# Altium PCB ET4207_DEBUG.PcbDoc
Units mil, origin at the board's own origin, x right, y up, seen from the top; angles counter-clockwise.
Board outline 3108.03 x 2008.03 mil, 2 copper layers (Top Layer, Bottom Layer); 65 components, 38 nets, 176 pads, 41 vias.
Unrouted connection lines stored in the file: 4.
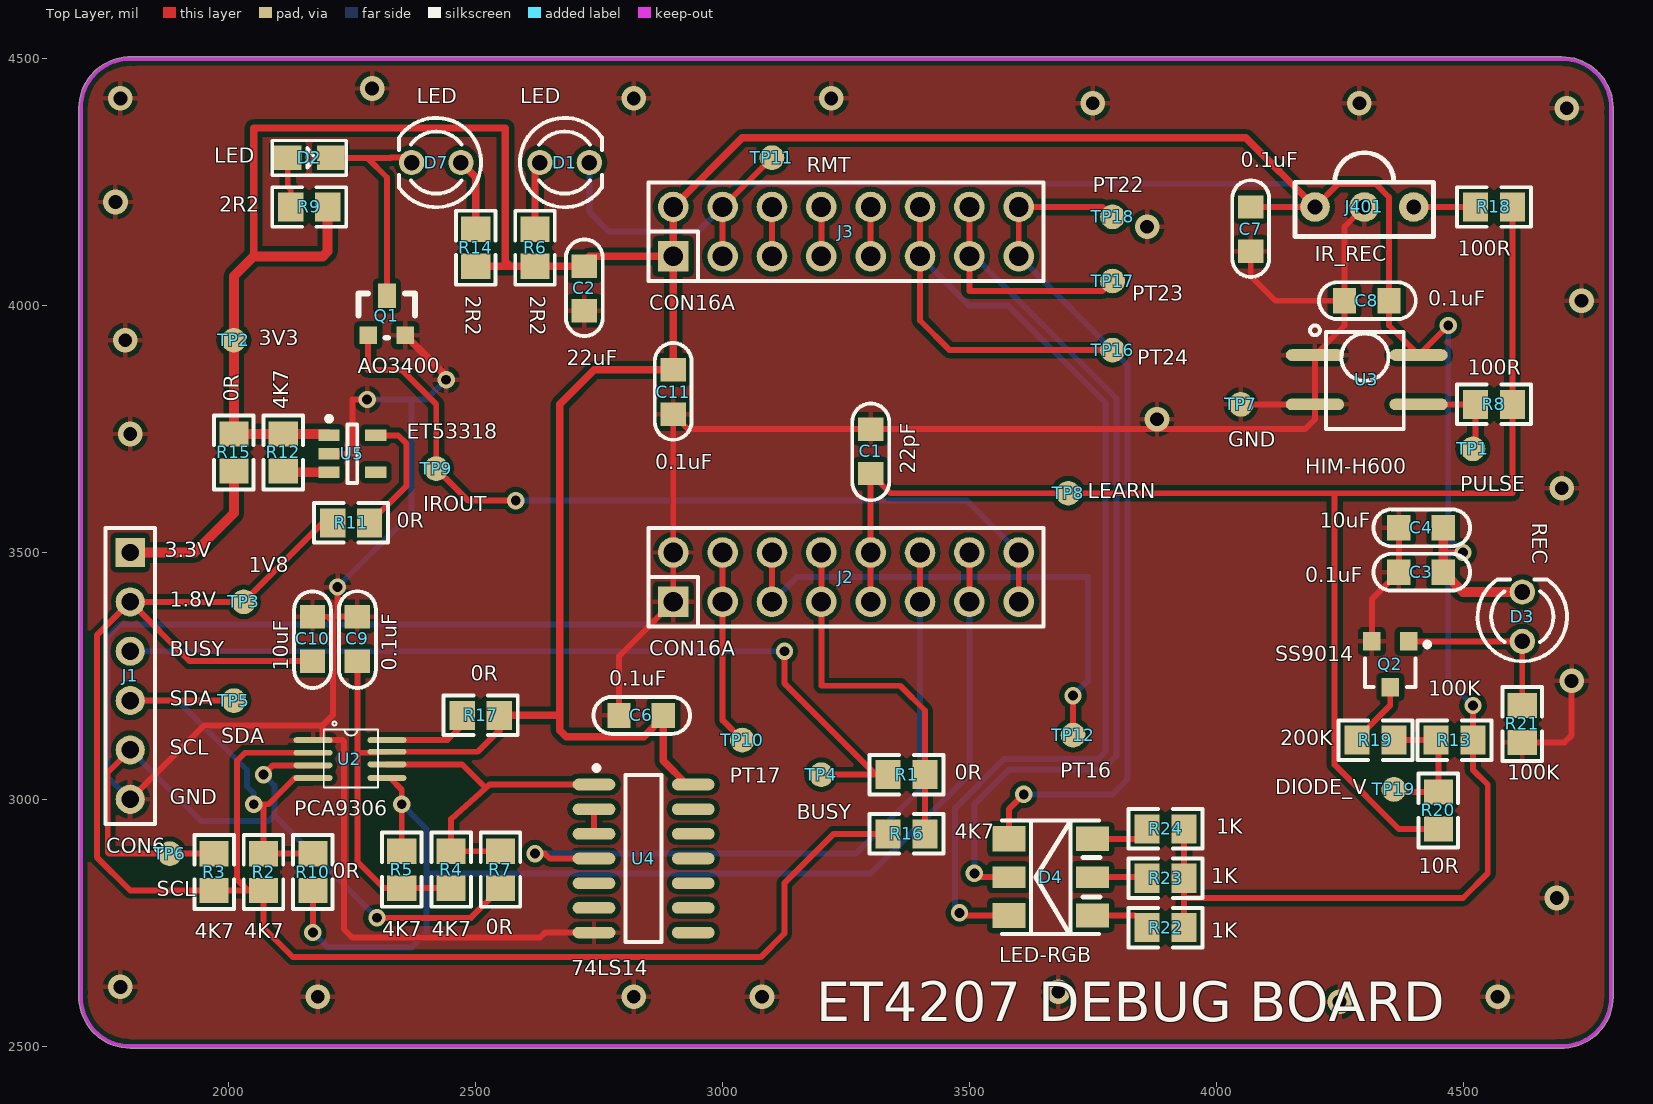
[diagram p0: Top Layer view]
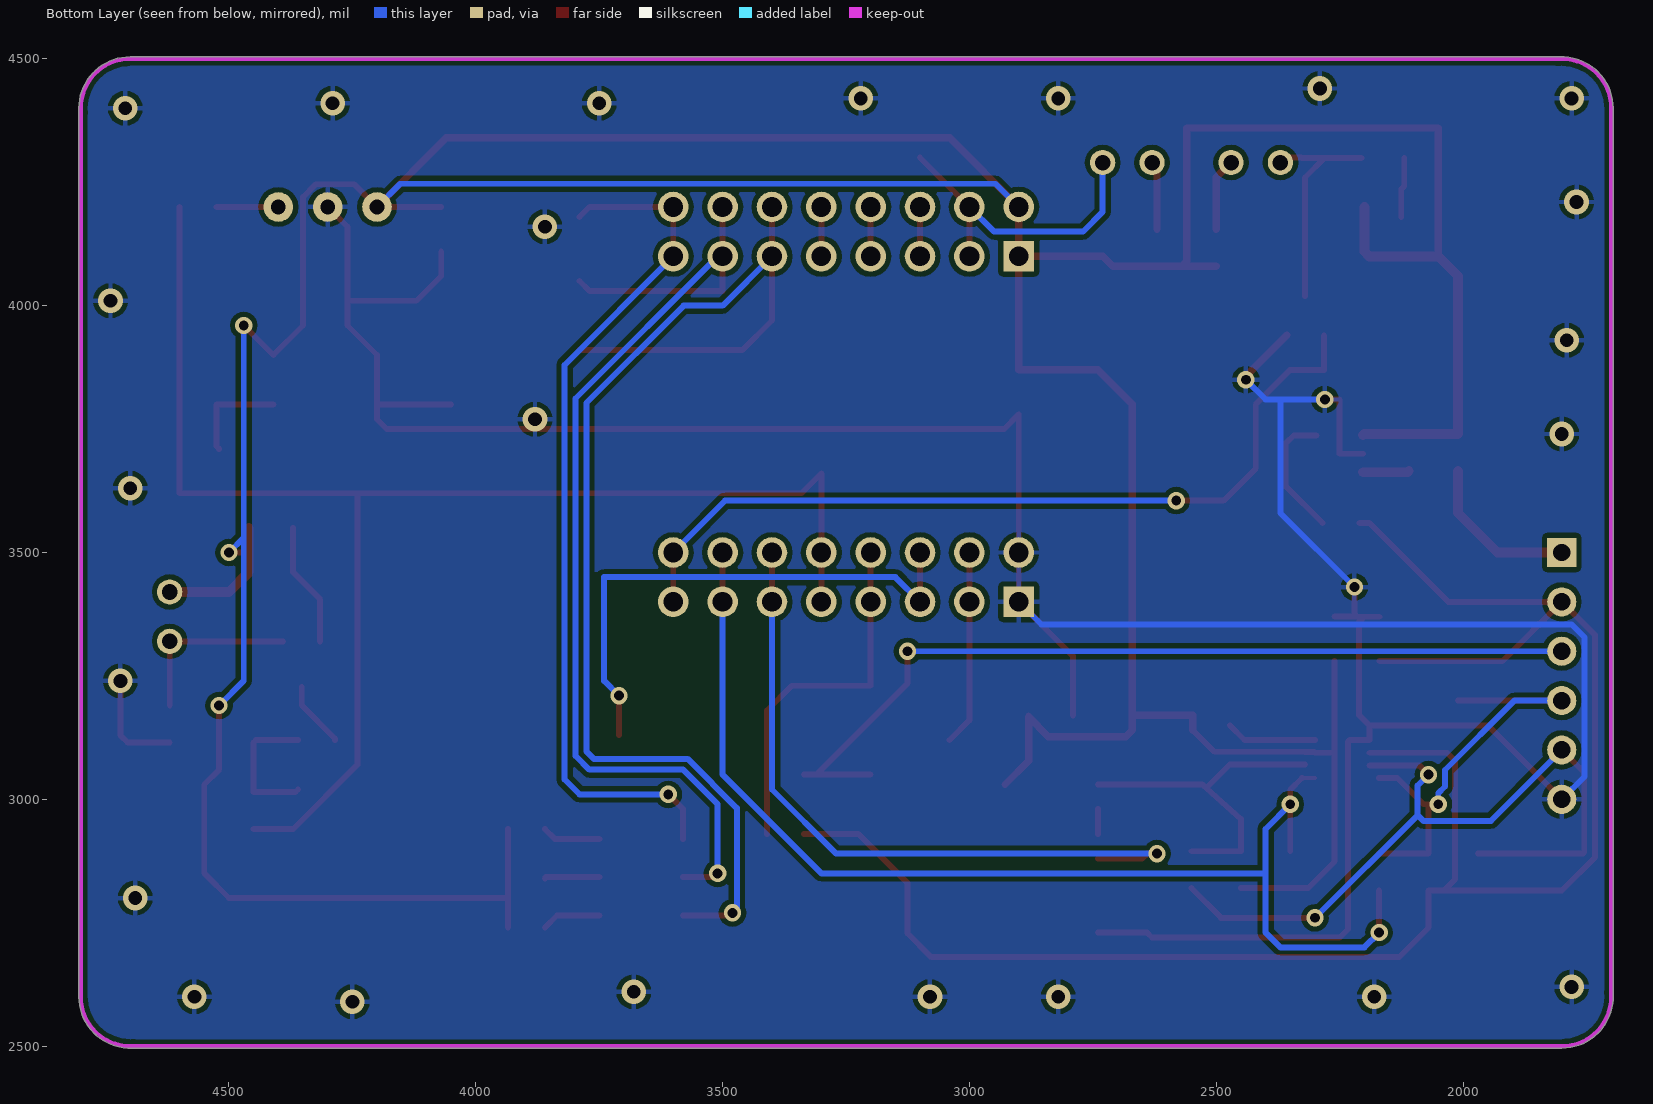
[diagram p1: Bottom Layer view, seen from below]
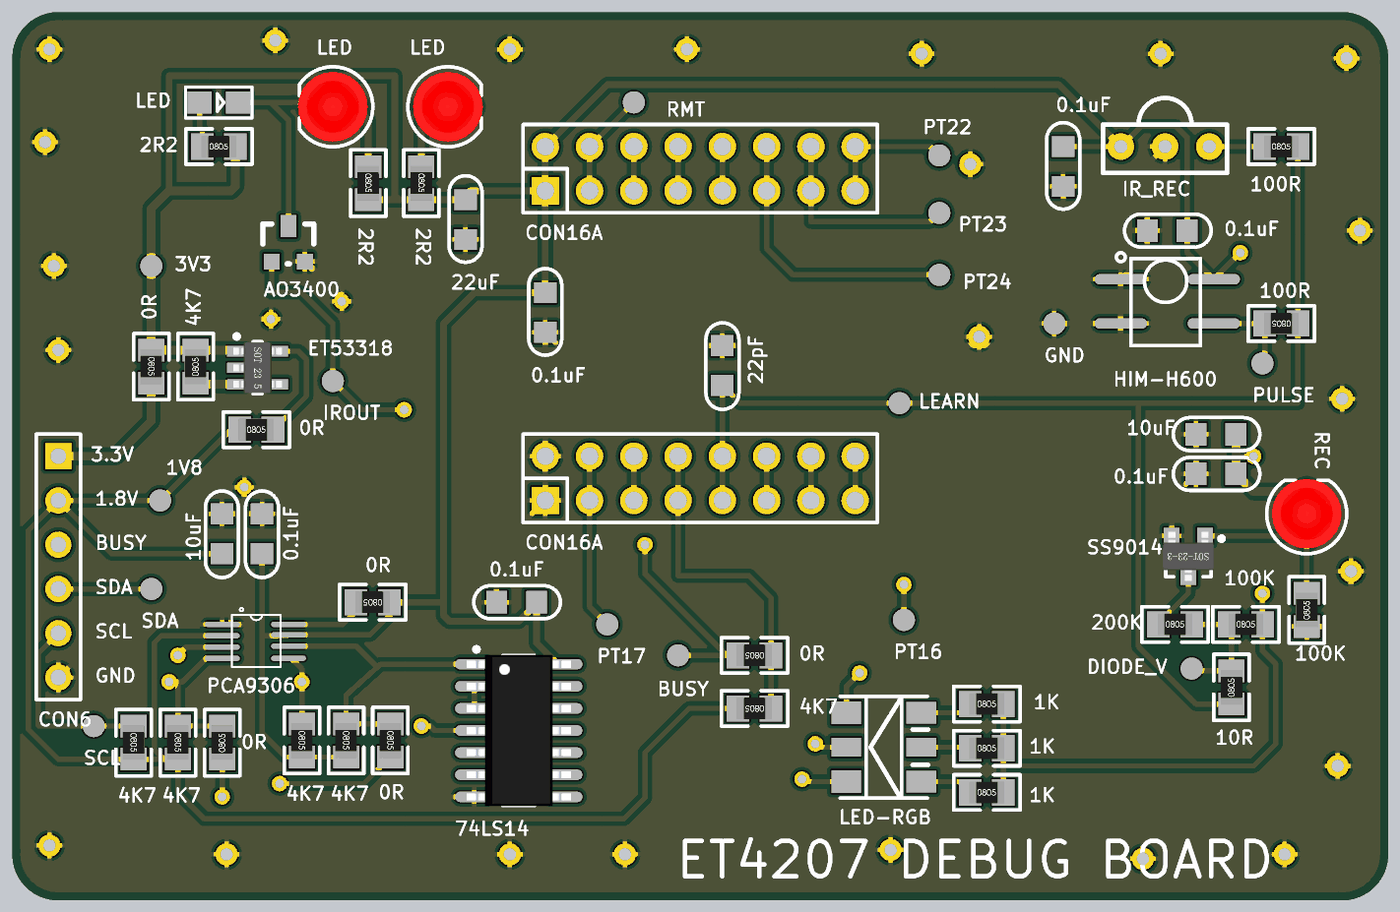
[diagram p2: 3D render of the assembled board from above, using the file's embedded part models]

## Layer stack, top to bottom
Top Solder: solder mask 0.4, Solder Resist, Dk 3.5
Top Layer: signal copper 1.4
Dielectric 1: dielectric 12.6, FR-4, Dk 4.8
Bottom Layer: signal copper 1.4
Bottom Solder: solder mask 0.4, Solder Resist, Dk 3.5

## Board outline
1800,2495.99 cw(c1800,2600) 1696.05,2603.62 1696.05,4399.29 cw(c1700,4400) 1695.98,4400 cw(c1800,4400) 1803.62,4503.95 4699.29,4503.95 cw(c4700,4500) 4700,4504.02 cw(c4700,4400) 4804.02,4400 cw(c4700,4400) 4803.95,4396.38 4803.95,2600.71 cw(c4800,2600) 4804.02,2600 cw(c4700,2600) 4696.38,2496.05 1800.71,2496.05 cw(c1800,2500)

## Design rules (kind name [scope] priority, off if disabled: settings)
Clearance [All] p1: gap=10 ignorepadtopadclearanceinfootprint=FALSE
PolygonConnect [All] p1: connectstyle=Relief reliefconductorwidth=10 reliefentries=4 polygonreliefangle="90 Angle" airgapwidth=10
RoutingVias [All] p1: holewidth=20 width=35 viastyle="Through Hole" minholewidth=15 minwidth=25 maxholewidth=28 maxwidth=50
SolderMaskExpansion [All] p1: expansion=4
Width [All] p1: maxlimit=40 minlimit=8 preferedwidth=12
30 further rules are at their usual default settings.

## Components (designator, comment, footprint, x,y, rotation, side; value= is the part's Value field where it differs from the comment)
C1 "22pF" 0805C 3300.73,3660.14 r0 top
C2 "22uF" 0805C 2719.27,4079.86 r180 top
C3 "0.1uF" 0805C 4459.86,3460.73 r90 top
C4 "10uF" 0805C 4459.86,3550.73 r90 top
C6 "0.1uF" 0805C 2879.86,3170.73 r90 top
C7 "0.1uF" 0805C 4069.27,4199.86 r180 top
C8 "0.1uF" 0805C 4349.86,4010.73 r90 top
C9 "0.1uF" 0805C 2260.73,3280.14 r0 top
C10 "10uF" 0805C 2170,3280 r0 top
C11 "0.1uF" 0805C 2899.27,3869.86 r180 top
D1 "LED" LED_A2 2680,4290 r180 top
D2 "LED" LED-0805 2120,4300 r0 top
D3 "REC" LED_A2 4620,3370 r270 top
D4 "LED-RGB" LED-5050 3664.65,2842.24 r180 top
D7 "LED" LED_A2 2420,4290 r0 top
J1 "CON6" HDR1X6 1800,3500 r270 top
J2 "CON16A" DIP16-2.54 3250,3450 r0 top
J3 "CON16A" DIP16-2.54 3250,4150 r0 top locked
J401 "IR_REC" IR 4400,4200 r180 top
Q1 "AO3400" SOT-23 2312,3980 r0 top
Q2 "SS9014" SOT23-3 4352.6,3273.74 r180 top
R1 "0R" 0805R 3372.6,3050 r180 top
R2 "4K7" 0805R 2070,2852.6 r270 top
R3 "4K7" 0805R 1970,2852.6 r270 top
R4 "4K7" 0805R 2450,2857.4 r270 top
R5 "4K7" 0805R 2350,2857.4 r270 top
R6 "2R2" 0805R 2620,4117.4 r270 top
R7 "0R" 0805R 2550,2857.4 r270 top
R8 "100R" 0805R 4562.6,3800 r180 top
R9 "2R2" 0805R 2162.6,4200 r0 top
R10 "0R" 0805R 2170,2852.6 r90 top
R11 "0R" 0805R 2247.4,3560 r0 top
R12 "4K7" 0805R 2110,3702.6 r90 top
R13 "100K" 0805R 4482.6,3120 r0 top
R14 "2R2" 0805R 2500,4117.4 r270 top
R15 "0R" 0805R 2010,3702.6 r270 top
R16 "4K7" 0805R 3372.6,2930 r180 top
R17 "0R" 0805R 2510,3170 r180 top
R18 "100R" 0805R 4562.6,4200 r0 top
R19 "200K" 0805R 4322.6,3120 r0 top
R20 "10R" 0805R 4450,2977.4 r90 top
R21 "100K" 0805R 4620,3152.6 r90 top
R22 "1K" 0805R 3897.4,2740 r0 top
R23 "1K" 0805R 3897.4,2840 r0 top
R24 "1K" 0805R 3897.4,2940 r0 top
TP1 "PULSE" TP-SM-C-100 4520,3710 r0 top
TP2 "3V3" TP-SM-C-100 2010,3930 r90 top
TP3 "1V8" TP-SM-C-100 2030,3400 r90 top
TP4 "BUSY" TP-SM-C-100 3200,3050 r90 top
TP5 "SDA" TP-SM-C-100 2010,3200 r90 top
TP6 "SCL" TP-SM-C-100 1880,2890 r90 top
TP7 "GND" TP-SM-C-100 4050,3800 r90 top
TP8 "LEARN" TP-SM-C-100 3700,3620 r90 top
TP9 "IROUT" TP-SM-C-100 2420,3670 r90 top
TP10 "PT17" TP-SM-C-100 3040,3120 r90 top
TP11 "RMT" TP-SM-C-100 3100,4300 r90 top
TP12 "PT16" TP-SM-C-100 3710,3130 r90 top
TP16 "PT24" TP-SM-C-100 3790,3910 r90 top
TP17 "PT23" TP-SM-C-100 3790,4050 r90 top
TP18 "PT22" TP-SM-C-100 3790,4180 r90 top
TP19 "DIODE_V" TP-SM-C-100 4360,3020 r90 top
U2 "PCA9306" DCT-G8 2192.05,3043.23 r0 top
U3 "HIM-H600" HIM-H600 4380,3750 r90 top
U4 "74LS14" SOIC-14 2840,2880 r0 top
U5 "ET53318" SOT23-5 2250,3700 r0 top

## Footprints (in the part's own frame and the unit in brackets; to place one, negate y for a bottom-side part, rotate by r counter-clockwise, add the part's x,y. Pads: shape width x height; smd on the part's side, far side on the other; paste and mask are expansions set on the pad)
0805C [mm]
  rect 1.3x1.2 smd: 1(-0.019,-0.004) 2(-0.019,2.282)
  silkscreen extent -0.97,-1.38 0.93,3.59
0805R [mm] "0805带丝印"
  rect 1.3x1.5 smd: 1(-0.95,0) 2(0.95,0)
  silkscreen extent -1.9,-1.02 1.91,1.02, body extent -1,-0.62 1,0.63, height 0.5
DCT-G8 [mm]
  oval 2x0.3 smd: 1(-0.55,1.95) 2(-0.55,1.3) 3(-0.55,0.65) 4(-0.55,0) 5(3.25,0) 6(3.25,0.7) 7(3.25,1.35) 8(3.25,1.95)
  silkscreen extent 0,-0.5 2.8,2.9
DIP16-2.54 [mil]
  rect 62x62 hole 40: 1(-350,-50)
  round 62 hole 40: 2(-350,50) 3(-250,-50) 4(-250,50) 5(-150,-50) 6(-150,50) 7(-50,-50) 8(-50,50) 9(50,-50) 10(50,50) 11(150,-50) 12(150,50) 13(250,-50) 14(250,50) 15(350,-50) 16(350,50)
  silkscreen extent -400,-100 400,100
HDR1X6 [mm] "Connector; Header; 6 Position"
  rect 1.5x1.5 hole 0.9: 1(0,0)
  round 1.5 hole 0.9: 2(2.54,0) 3(5.08,0) 4(7.62,0) 5(10.16,0) 6(12.7,0)
  silkscreen extent -1.27,-1.27 13.97,1.27
HIM-H600 [mm]
  oval 0.6x3 smd: 1(3.81,4.572) 2(1.27,4.572) 3(1.27,-0.762) 4(3.81,-0.762)
  silkscreen extent 0,0 5.33,4.83
IR [mil]
  round 60 hole 30: 1(0,0) 2(100,0) 3(200,0)
  silkscreen extent -40,-110 240,60
LED-0805 [mm]
  rect 1.4x1.27 smd: 1(-0.025,-0.01) 2(2.185,-0.01)
  silkscreen extent -0.82,-0.9 2.99,0.88
LED-5050 [mm]
  rect 1.7x1.25 smd: 1(-2.15,1.975) 5(-2.15,-1.975)
  rect 1.7x1.3 smd: 2(2.15,1.975) 6(2.15,-1.975)
  rect 1.7x1.1 smd: 3(-2.15,0) 4(2.15,0)
  silkscreen extent -2.54,-2.92 2.5,2.92
LED_A2 [mm] "直径3MM LED"
  round 1.3 hole 0.8: 1(1.27,0) 2(-1.27,0)
  silkscreen extent -1.91,-2.3 2.3,2.3, body extent -2,-2 2,2, height 4.5
SOIC-14 [mm] "SOP, 14-Leads,"
  oval 2.2x0.6 smd: 1(-2.552,3.81) 2(-2.552,2.54) 3(-2.552,1.27) 4(-2.552,0) 5(-2.552,-1.27) 6(-2.552,-2.54) 7(-2.552,-3.81) 8(2.552,-3.81) 9(2.552,-2.54) 10(2.552,-1.27) 11(2.552,0) 12(2.552,1.27) 13(2.552,2.54) 14(2.552,3.81)
  silkscreen extent -2.55,-4.3 0.93,4.78, body extent -3,-4.35 2.99,4.35, height 1.55
SOT23-3 [mm]
  rect 0.9x0.95 smd: 1(-0.95,-1.175) 2(0.95,-1.175) 3(0,1.175)
  silkscreen extent -2.03,-1.14 1.3,1.18, body extent -1.45,-1.4 1.45,1.4, height 1.2
SOT23-5 [mm] "SOT23-5"
  rect 1.1x0.6 smd: 1(-1.2,0.95) 2(-1.2,0) 3(-1.2,-0.95) 4(1.2,-0.95) 5(1.2,0.95)
  silkscreen extent -1.32,-1.5 0.25,1.92, body extent -1.4,-1.45 1.4,1.45, height 1.2
SOT-23 [mil]
  rect 36x36 smd: 1(-30,-40) 2(45,-40)
  rect 36x50 smd: 3(8,40)
  silkscreen extent -50,-45 65,45
TP-SM-C-100 [mil] "Test Point, Surface Mounting, Circular, Pad Diameter 1mm"
  round 50 smd: 1(0,0)

## Part data
C1 C2 C3 C4 C6 C7 C8 C9 C10 C11: library part "CAPACITOR NON-POL"
D1 D2 D3 D7: library part LED_3
D4: library part LED-RGB-5050, "三基色LED", LatestRevisionDate=08-Jul-2005, LatestRevisionNote="Mech Layer 1 removed.", PackageReference=LED-0, Published=8-Jun-2000, Publisher="Altium Limited"
J2 J3: library part CON16A_0
J401: library part CON3_0
Q1: library part MOSFET_I_EN_GSD, "MOSFET N-CH 50V 200MA SOT-23", Mfr_Name="On Semi", Mfr_Part_Number=BSS138LT3G, Datasheet=http://www.onsemi.com/pub_link/Collateral/BSS138LT1-D.PDF, Distributor_Part_Number=BSS138LT3GOSCT-ND, TI_Part_No=TI-MOS-BSS138LT3G
Q2: "NPN贴片三极管", PackageDocument=Sep-1998, Code_JEDEC=TO-92A, ComponentLink1Description="Manufacturer Link", ComponentLink1URL=http://www.fairchildsemi.com/, ComponentLink2Description=Datasheet, ComponentLink2URL=http://www.fairchildsemi.com/ds/2N%2F2N3904.pdf, DatasheetDocument=1997, LatestRevisionDate=15-Jan-2003, LatestRevisionNote="PCB Footprint 'BCY-W3/D4.7' replaced", PackageReference=TO-92A, Published=8-Jun-2000, Publisher="Altium Limited"
R1 R2 R3 R4 R5 R6 R7 R8 R9 R10 R11 R12 R13 R14 R15 R16 R17 R18 R19 R20 R21 R22 R23 R24: library part RESISTOR, MODULE=CPU
TP1 TP2 TP3 TP4 TP5 TP6 TP7 TP8 TP9 TP10 TP11 TP12 TP16 TP17 TP18 TP19: library part TP-SM, "Test Point, Surface Mount, Circular, Pad Diameter 1 mm"
U3: library part LPC111x_7, DEVICE=ET4003YD, MODULE=CPU
U4: library part STM32F103C8_1
U5: library part ET53333

## Via types
v1: diameter 50, hole 28, Top Layer to Bottom Layer, 23 vias
v2: diameter 35, hole 20, Top Layer to Bottom Layer, 18 vias

## Nets (pads, with @x,y where several pads share a name; then routed paths per layer and width w, separated by ;. In a path a pad name is that pad's centre, name@x,y a point inside that pad or via, vN(x,y) a via of type N, cw(c..) or ccw(c..) an arc to the next point about the centre after c; other vN are vias at no path point)
BUSY: J1.3 R1.2 TP4.1 | length 1786.9
  Top Layer w12: v2(3125.2,3300) 3125.2,3234.8 R1.2@3310,3050 ; TP4.1 R1.2@3310,3050 ; R1.2 R1.2@3310,3050
  Bottom Layer w12: J1.3 v2(3125.2,3300)
DEMO_SCL: J1.5 R3.1 R7.2 TP6.1 U2.3 | length 1586.8
  Top Layer w12: J1.5 1754.47,3054.47 1754.47,2892.53 1757,2890 TP6.1 R3.1 ; v2(2070,3050) 2088.82,3068.82 U2.3 U2.3@2189.76,3068.82 ; v2(2300,2760) 2490,2760 R7.2
  Bottom Layer w12: J1.5 1943.5,2956.5 2080.5,2956.5 2092,2968 ; v2(2070,3050) 2092,3028 2092,2968 ; v2(2300,2760) 2092,2968
DEMO_SDA: J1.4 R2.1 R10.2 TP5.1 U2.4 | length 922.2
  Top Layer w12: J1.4 TP5.1 ; v2(2050.16,2990) 2070.16,2990 ; R10.2 R2.1 2070,2969 2070.16,2969.16 2070.16,2990 ; U2.4 2133.23,3043.23 2080,2990 2070.16,2990
  Bottom Layer w12: J1.4 1896,3200 2036.5,3059.5 2036.5,3026.12 2050.16,3012.47 v2(2050.16,2990)
GND: C1.2 C2.2 C3.2 C4.2 C6.2 C7.2 C8.2 C9.2 C10.2 C11.2 J1.6 J2.1 J2.2 J401.2 Q1.2 Q2.2 R21.1 TP7.1 U2.1 U3.1 U3.2 U4.7 U5.2 | length 7590.9
  Top Layer w12: J1.6 1949.76,3149.76 2189.76,3149.76 ; C10.2 2200,3369.86 ; U5.2 2250,3700 2250,3810 v2(2280,3810) ; v2(2220,3430) 2220,3375.86 2214.14,3370 ; C9.2 2214.14,3370 ; U4.7 2640,2730 2630,2720 2250,2720 2233,2737 2233,3117 2230,3120 2189.76,3120 2189.76,3149.76 ; C6.2 2790,3290 J2.1 J2.2 C11.2 2930,3750 C1.2 4180,3750 4200,3770 U3.2 ; TP7.1 U3.2 ; C7.2 4070,4060 4120,4010 C8.2 ; J401.2 4260,4160 C8.2 ; Q2.2 4315.2,3405.2 C3.2 C4.2 ; R21.1 4705.2,3115.2 4720,3130 v1(4720,3240) ; 2189.76,3149.76 2211,3171 2211,3358.86 2200,3369.86 ; 2200,3369.86 2214,3369.86 2214.14,3370 ; U3.2 U3.1 4260,3960 C8.2
  Top Layer w15: Q1.2 2440,3857 v2(2440,3850)
  Bottom Layer w12: J1.6 1754,3046 1754,3328 1780,3354 2854,3354 J2.1 ; v2(2220,3430) 2370,3580 2370,3810 ; v2(2280,3810) 2370,3810 ; v2(2440,3850) 2400,3810 2370,3810
  other v1: 4250,2590 2180,2600 2820,2600 3080,2600 4570,2600 3680,2610 1780,2620 4690,2800 4700,3630 1800,3740 3880,3770 1790,3930 4740,4010 3860,4160 1770,4210 4710,4400 3750,4410 4290,4410 1780,4420 2820,4420 3220,4420 2290,4440
I2C_SCL: R4.1 R7.1 U2.6 U4.1 | length 701.4
  Top Layer w12: U2.6 2472.03,3070.79 2520,3022.82 ; R7.1 R4.1 2450,2960 2520,3022.82 ; U4.1 2528,3030 2520,3022.82
LEARN: C1.1 J2.9 J2.10 R8.1 R18.2 R20.1 TP8.1 | length 2970.4
  Top Layer w12: J2.9 J2.10 C1.1 3340,3620 TP8.1 4240,3620 ; R20.1 4370,2940 4240,3070 4240,3620 ; R18.2 R8.1 4600,3620 4240,3620
LED_B: D4.6 J3.15 J3.16 TP18.1 | length 1774.3
  Top Layer w12: D4.6 3580,2980 v2(3610,3010) ; J3.15 J3.16 3770,4200 TP18.1
  Bottom Layer w12: J3.15 3820,3880 3820,3040 3790,3010 v2(3610,3010)
LED_G: D4.4 J3.13 J3.14 TP17.1 | length 2151.4
  Top Layer w12: J3.14 J3.13 3500,4030 3770,4030 TP17.1 ; v2(3510,2850) 3517.76,2842.24 D4.4
  Bottom Layer w12: J3.13 3510,4100 3798,3812 3798,3088 3770,3060 3580,3060 3510,2990 v2(3510,2850)
LED_R: D4.2 J3.11 J3.12 TP16.1 | length 2520.4
  Top Layer w12: J3.12 J3.11 3400,3970 3460,3910 TP16.1 ; v2(3480,2770) 3485.51,2764.49 D4.2
  Bottom Layer w12: J3.11 3500,4000 3578.89,4000 3776,3802.89 3776,3097.11 3760.89,3082 3570.89,3082 3471.11,2982.23 3471.11,2778.89 v2(3480,2770)
NetD1_1: D1.1 R6.1 | length 139.3
  Top Layer w15: R6.1 2620,4280 D1.1
NetD2_1: D2.1 R9.1 | length 122.1
  Top Layer w12: D2.1 2119.03,4242.17 2125.2,4236 R9.1 R9.1@2125.2,4180
NetD2_2: D2.2 D7.2 Q1.3 | length 470.3
  Top Layer w12: D2.2 2280,4299.59 ; Q1.3 2320,4259.59 2280,4299.59 ; D7.2@2380,4300 2327.41,4300 2327,4299.59 2280,4299.59
NetD3_1: D3.1 Q2.1 R21.2 | length 360
  Top Layer w12: Q2.1 D3.1 R21.2
NetD4_1: D4.1 R22.1 | length 120.9
  Top Layer w12: D4.1 3835.51,2764.49 R22.1
NetD4_3: D4.3 R23.1 | length 111.6
  Top Layer w12: D4.3 3857.76,2842.24 R23.1
NetD4_5: D4.5 R24.1 | length 119
  Top Layer w12: D4.5 3840,2920 R24.1
NetD7_1: D7.1 R14.1 | length 147.6
  Top Layer w15: D7.1 2500,4260 R14.1
NetJ1_1: J1.1 R15.2 | length 328.3
  Top Layer w20: J1.1 1930,3500 2010,3580 R15.2
NetJ2_3: J2.3 J2.4 TP10.1 | length 396.6
  Top Layer w12: J2.4 J2.3 3000,3160 TP10.1
NetJ2_5: J2.5 J2.6 TP12.1 | length 1093.1
  Top Layer w12: J2.5 J2.6 ; TP12.1 v2(3710,3210)
  Bottom Layer w12: J2.5 3150,3450 3740,3450 3740,3240 v2(3710,3210)
NetJ2_7: J2.7 J2.8 R1.1 R16.1 | length 750.7
  Top Layer w12: J2.8 J2.7 3200,3230 3360,3230 3410,3180 R1.1 R16.1
NetJ3_5: J3.5 J3.6 | length 100
  Top Layer w12: J3.5 J3.6
NetJ3_7: J3.7 J3.8 | length 100
  Top Layer w12: J3.7 J3.8
NetJ3_9: J3.9 J3.10 | length 100
  Top Layer w12: J3.9 J3.10
NetJ401_1: J401.1 R18.1 | length 125.2
  Top Layer w12: J401.1 R18.1
NetQ2_3: Q2.3 R19.1 | length 135.4
  Top Layer w12: R19.1 4285.2,3122.94 4352.6,3190.34 Q2.3
NetR8_2: R8.2 TP1.1 U3.3 | length 207.3
  Top Layer w12: U3.3 R8.2 4525.2,3715.2 TP1.1
NetR11_2: R11.2 U5.5 | length 261.1
  Top Layer w12: R11.2 2360,3635.2 2360,3720 2342.6,3737.4 U5.5
NetR12_1: R12.1 U5.3 | length 93.8
  Top Layer w20: R12.1 2112.6,3662.6 U5.3
NetR13_1: R13.1 R19.2 R20.2 TP19.1 | length 284.5
  Top Layer w12: TP19.1 4365.2,3014.8 R20.2 4450,3115.2 R13.1 R19.2
NetR17_2: R17.2 U2.8 | length 185
  Top Layer w12: U2.8@2300,3120 U2.8 2442.6,3120 R17.2@2472.6,3150
NetU4_2: U4.2 U4.3 | length 50
  Top Layer w12: U4.3 U4.2
PWMOUT: J2.15 J2.16 Q1.1 TP9.1 | length 1717.4
  Top Layer w12: Q1.1 2282,3870 2350,3870 2420,3800 TP9.1 2485,3605 v2(2581,3605) ; J2.15 J2.16
  Bottom Layer w12: v2(2581,3605) 3495,3605 J2.16
RMT: D1.2 J3.3 J3.4 TP11.1 | length 648.7
  Top Layer w12: J3.3 J3.4 TP11.1
  Bottom Layer w12: D1.2 2730,4190 2770,4150 2950,4150 J3.4
SCL: J2.11 J2.12 U4.4 | length 1437.5
  Top Layer w12: v2(2620,2890) 2640,2890 2650,2880 U4.4 ; 3500,3400 3500,3500
  Bottom Layer w12: v2(2620,2890) 3270,2890 3400,3020 J2.11
SDA: J2.13 J2.14 R5.1 R10.1 U2.5 | length 2438.1
  Top Layer w8: U2.5@2300,3043.23 U2.5 U2.5@2326.18,3043.23
  Top Layer w12: v2(2170,2730) R10.1 ; U2.5@2326.18,3043.23 2350,3019.41 v2(2350,2990) R5.1 ; 3400,3400 3400,3500
  Bottom Layer w12: v2(2170,2730) 2200,2700 2370,2700 2400,2730 2400,2850 ; v2(2350,2990) 2400,2940 2400,2850 ; J2.13 3500,3050 3300,2850 2400,2850
VDD_1V8: C10.1 J1.2 R2.2 R3.2 R11.1 R16.2 TP3.1 U2.2 | length 3786.6
  Top Layer w12: C10.1 1920.14,3279.86 J1.2 ; U2.2@2189.76,3094.41 U2.2 2032.41,3094.41 2016.66,3078.66 2016.66,2837.34 2038.8,2815.2 ; R11.1 2190,3560 TP3.1 J1.2 ; R16.2 3225.2,2930 3125.2,2830 3125.2,2728.2 3077.19,2680.19 2129.81,2680.19 2070,2740 R2.2 2038.8,2815.2 ; J1.2 1732.47,3332.47 1732.47,2882.72 1800,2815.2 R3.2 2038.8,2815.2
VDD_3V3: C2.1 C3.1 C4.1 C6.1 C7.1 C8.1 C9.1 C11.1 D3.2 J3.1 J3.2 J401.3 R4.2 R5.2 R6.2 R9.2 R12.2 R13.2 R14.2 R15.1 R17.1 R22.2 R23.2 R24.2 TP2.1 U2.7 U3.4 U4.14 U5.1 | length 10821.1
  Top Layer w12: C9.1 2260,3090 ; U2.7@2320,3095.59 2301.18,3095.59 2300,3094.41 2264.41,3094.41 2260,3090 ; U2.7 2503.78,3096.38 2547.4,3140 ; R4.2 R5.2 2314,2820 2260,2874 2260,3090 ; C6.1@2880,3167 C6.1 ; R22.2 3934.8,2800 ; R24.2 R23.2 3934.8,2800 ; C7.1 J401.3 4246,4246 4324,4246 4350,4220 C8.1 4350,3960 U3.4 v2(4470,3960) ; 4460,3505 4465,3500 v2(4500,3500) ; v2(4520,3190) R13.2 4520,3060 4550,3030 4550,2850 4500,2800 3934.8,2800
  Top Layer w15: 2050,4100 2050,4360 2560,4360 2560,4090 2570,4080 ; R14.2 2570,4080 ; 2547.4,3140 R17.1 2670,3170 ; U4.14@2927.85,3030 2880,3077.85 2880,3167 2840,3127 2820.96,3127 2820.87,3126.91 2683.09,3126.91 2670,3140 2670,3170 ; J401.3 4060,4340 3040,4340 J3.2 J3.1 ; 2570,4080 R6.2 2710,4080 2730,4100 J3.1 ; 2670,3170 2670,3800 2740,3870 C11.1 J3.1
  Top Layer w20: R9.2 2200,4110 2190,4100 2050,4100 2010,4060 TP2.1 R15.1 R12.2 2200.16,3740 U5.1 ; C4.1 4460,3505 C3.1 4500,3420 D3.2
  Bottom Layer w12: J3.2 2947,4247 4153,4247 J401.3 ; v2(4470,3960) 4470,3530 ; v2(4500,3500) 4470,3530 ; v2(4520,3190) 4470,3240 4470,3530
pads on no net: U4.5 U4.6 U4.8 U4.9 U4.10 U4.11 U4.12 U4.13 U5.4

## Polygon pours and split planes (outlines as drawn)
GND on Top Layer "GND_L01_P014" (solid, remove dead copper, pour order 14): 1680,4550 1680,2520 1660,2500 1670,2490 4840,2490 4840,4520
GND on Bottom Layer "GND_L02_P016" (solid, remove dead copper, pour order 16): 1700,4570 1700,2430 4830,2430 4850,2450 4830,2470 4830,4540

## Keep-outs
Keep-Out Layer:
  lines w7.87: 1700,2600 1700,4400 ; 1800,2500 4700,2500 ; 1800,4500 4700,4500 ; 4800,2600 4800,4400
  lines w8: -1329.5,2529.95 ccw(c-1230,2520) -1230,2420 ; -1259.5,2579.95 ccw(c-1160,2570) -1160,2470 ; -1079.5,2279.95 ccw(c-980,2270) -980,2170 ; 1700,4400 cw(c1800,4400) 1809.95,4499.5 ; 1700.5,2609.95 ccw(c1800,2600) 1800,2500 ; 4690.05,2500.5 ccw(c4700,2600) 4800,2600 ; 4700,4500 cw(c4700,4400) 4799.5,4390.05

## Silkscreen, mask and mechanical layers (free items; w line width, h text height)
Top Overlay:
  text "3.3V" at 1870,3490 h30
  text "1.8V" at 1880,3390 h30
  text "BUSY" at 1880,3290 h30
  text "SDA" at 1880,3190 h30
  text "SCL" at 1880,3090 h30
  text "GND" at 1880,2990 h30
  text "ET4207 DEBUG BOARD" at 3190,2550 h80